# EAGLE board Arduino VoltageBreakerBoardv1r0 (EAGLE 6.5.0)
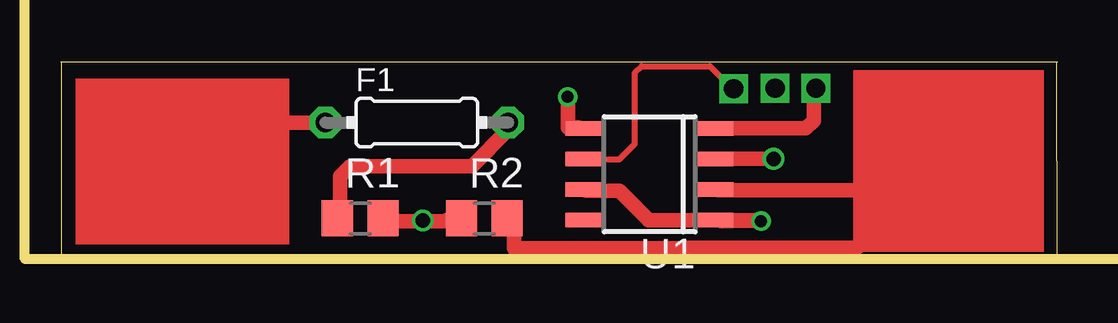
[diagram p0: board, top side]
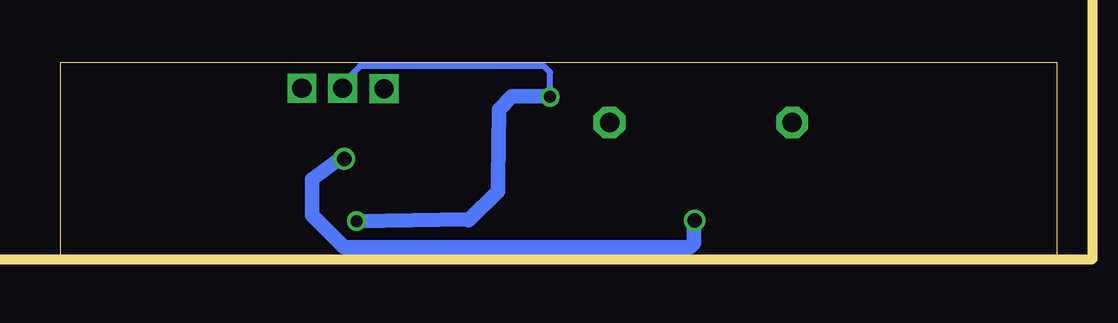
[diagram p1: board, bottom side, seen from below]

Size 41.59 x 8.24 mm. Coordinates in mm from the lower left corner, seen from the top.
Outline: 0,0 41.57,0 41.56,8.24
Outline: 0.04,8.24 0.04,0.03
Outline: 41.59,8.24 0.03,8.24
Copper layers (1*16): Top 0.035mm / dielectric 1.5mm / Bottom 0.035mm
Design rules "default": minimum track width 0.1mm, minimum drill 0.3mm, track to track 6mil, track to pad 6mil, pad to pad 6mil, via to via 6mil, smd to smd 6mil, copper to edge 10mil, drill to drill 10mil, minimum pad ring 10mil, minimum via ring 6mil, stop-mask expansion 2mil, vias tented up to drill 25mil, thermal gap 10mil
Net classes: 0 default: width 0.003 mm, drill 0.254 mm, clearance 0.152 mm
Milling: 4 lines

## Footprints (pad centres in the part's own frame; a part is rotated, then mirrored left to right if it is on the bottom)
0204/7 = drill 0.813 octagon: 1 -3.81,0; 2 3.81,0
R0805 = smd 1.3 x 1.5: 1 -0.95,0; 2 0.95,0
SOIC8 = smd 0.6 x 1.5: 1 -1.905,-2.75; 2 -0.635,-2.75; 3 0.635,-2.75; 4 1.905,-2.75; 5 1.905,2.75; 6 0.635,2.75; 7 -0.635,2.75; 8 -1.905,2.75

## Placement (x,y rotation side)
F1  [0204/7]  14.87,5.72 0 top
R1  [R0805]  12.51,1.73 0 top
R2  [R0805]  17.69,1.73 0 top
U1  [SOIC8]  24.58,3.57 90 top

## Library data of the parts
F1 R1 R2 = eagle-ltspice
U1 = linear

## Tracks (layer width: path | path; a pad name or v marks a point on that pad's centre or on a via)
S$1
  Top 0.61: 10.94,5.72 7.49,5.72 7.49,5.91
S$2
  Top 0.61: 36.58,3.33 36.71,3.3
S$3
  Top 0.61: 18.68,5.6 18.68,5.42 17.17,3.91 12.09,3.91 11.67,3.49 11.67,1.55 11.61,1.49
S$4
  Top 0.61: 13.66,1.61 16.08,1.61 16.14,1.67
S$5
  Top 0.61: 18.93,2.05 18.93,0.89 18.93,0.49 33.26,0.52 34.41,1.67
S$6  (via drill 0.6)
  other vias: 15.13,1.65
S$7
  Bottom 0.61: 15.16,1.59 15.16,0.69 15.33,0.52 29.74,0.52 31.07,1.86 31.07,3.37 29.96,4.19
S$8
  Top 0.254: 22.02,4.19 23.32,4.19 23.97,4.84 23.97,7.79 24.25,8.08 27.08,8.08 28.06,7.1
S$9  (via drill 0.5)
  other vias: 21.16,6.79
S$10
  Top 0.61: 21.18,6.67 21.18,5.5 21.6,5.53
S$11
  Top 0.61: 29.23,1.64 27.6,1.64 27.6,1.62
S$12
  Bottom 0.61: 21.21,6.82 22.74,6.82 23.3,6.26 23.32,3.34
S$13  (via drill 0.8)
  other vias: 31.51,7.16
S$14  (via drill 0.8)
  other vias: 29.81,7.16
S$15  (via drill 0.8)
  other vias: 28.09,7.13
S$16  (via drill 0.5)
  Bottom 0.61: v29.23,1.62 29.2,1.62 24.59,1.69
S$17
  Top 0.61: 27.87,5.48 31.09,5.48 31.42,5.81 31.42,7.02 31.54,7.14
S$18
  Top 0.61: 21.93,2.87 23.33,2.87 24.45,1.75
S$19
  Bottom 0.254: 21.15,6.82 21.15,7.81 21.42,8.08 29.09,8.08 29.88,7.29
S$20
  Top 0.61: 27.44,2.9 35.88,2.9 36.16,3.18
S$21
  Top 0.61: 24.53,1.64 29.22,1.64 29.23,1.64
S$22
  Bottom 0.61: 23.34,3.27 23.34,2.87 24.56,1.64
S$23  (via drill 0.6)
  other vias: 29.74,4.21
S$24
  Top 0.61: 29.72,4.21 27.54,4.21
(copper drawn outside any net)
  shapes: Top area x2